# Altium PCB AVR_Programing.PcbDoc
Units mil, origin at the board's own origin, x right, y up, seen from the top; angles counter-clockwise.
Board outline 6000 x 4000 mil, 2 copper layers (Top Layer, Bottom Layer); 20 components, 18 nets, 92 pads, 11 vias.
Unrouted connection lines stored in the file: 56.
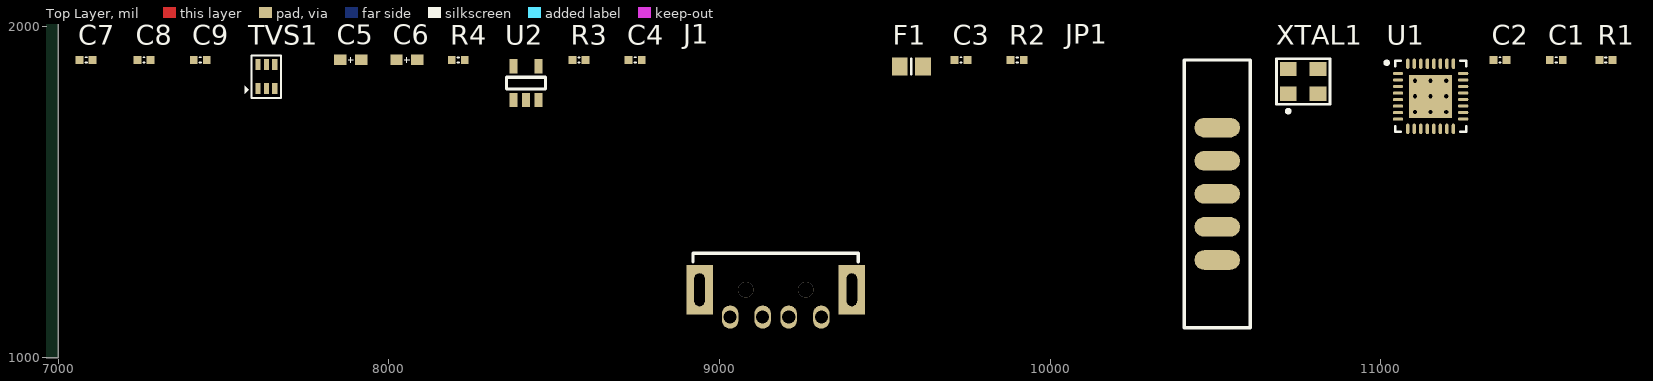
[diagram p0: Top Layer view]
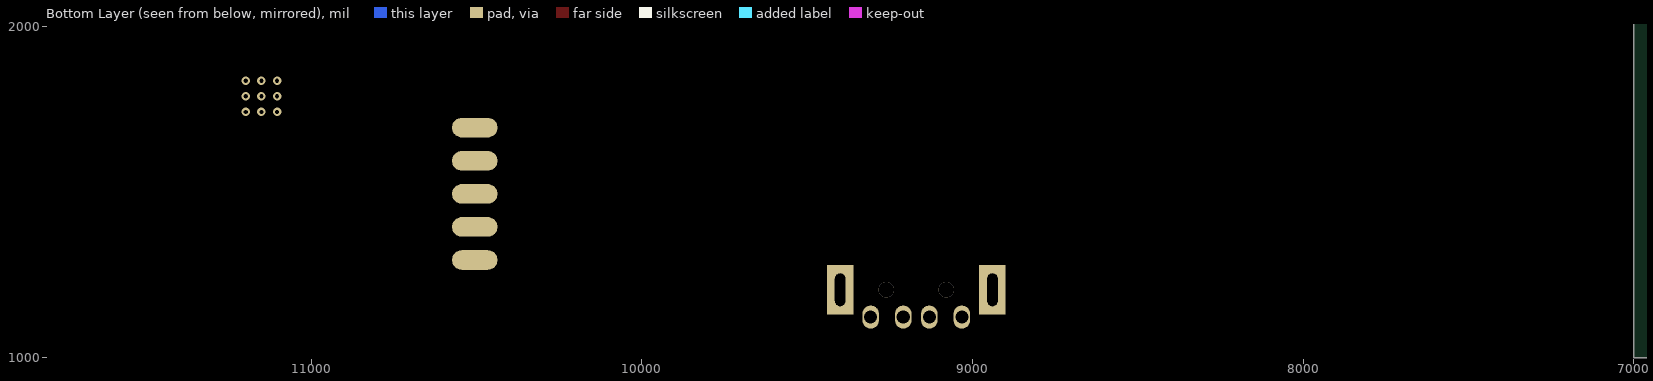
[diagram p1: Bottom Layer view, seen from below]

## Layer stack, top to bottom
Top Solder: solder mask 0.4, Solder Resist, Dk 3.5
Top Layer: signal copper 1.4
Dielectric 1: dielectric 12.6, FR-4, Dk 4.8
Bottom Layer: signal copper 1.4
Bottom Solder: solder mask 0.4, Solder Resist, Dk 3.5

## Board outline
1000,1000 7000,1000 7000,5000 1000,5000

## Design rules (kind name [scope] priority, off if disabled: settings)
Clearance [All] p1: gap=10 ignorepadtopadclearanceinfootprint=FALSE except(0: Arc-Hole Track-Hole SMDPad-Hole THPad-Hole Via-Hole Fill-Hole Poly-Hole Region-Hole Text-Hole)
PolygonConnect [All] p1: connectstyle=Relief reliefconductorwidth=10 reliefentries=4 polygonreliefangle="90 Angle" airgapwidth=10
RoutingVias [All] p1: holewidth=28 width=50 viastyle="Through Hole" minholewidth=28 minwidth=50 maxholewidth=28 maxwidth=50
SolderMaskExpansion [All] p1: expansion=4
Width [All] p1: maxlimit=10 minlimit=10 preferedwidth=10
30 further rules are at their usual default settings.

## Components (designator, comment, footprint, x,y, rotation, side; value= is the part's Value field where it differs from the comment)
C1 "100nF" 0402_cap 11530,1900 r0 top value=103
C2 "18pF" 0402_cap 11360,1900 r0 top value=103
C3 "18pF" 0402_cap 9730,1900 r0 top value=103
C4 "1uF" 0402_cap 8745,1900 r0 top value=103
C5 "1uF" 0603_cap 7885,1900 r0 top value=103
C6 "1uF" 0603_cap 8055,1900 r0 top value=103
C7 "100nF" 0402_cap 7085,1900 r0 top value=103
C8 "100nF" 0402_cap 7260,1900 r0 top value=103
C9 "100nF" 0402_cap 7430,1900 r0 top value=103
F1 "500mA" 0805_Res 9580,1880 r0 top value="R1/4W - 1K"
J1 "USB_A" USB-A 9170,1205 r0 top
JP1 "JP5X2" "IDC10 HORIZONTAL" 10505,1495 r90 top
R1 "10k" 0402_res 11680,1900 r0 top value="R1/4W - 1K"
R2 "1M" 0402_res 9900,1900 r0 top value="R1/4W - 1K"
R3 "22" 0402_res 8575,1900 r0 top value="R1/4W - 1K"
R4 "22" 0402_res 8210,1900 r0 top value="R1/4W - 1K"
TVS1 "SMF05C" SC70-6 7630,1850 r0 top
U1 "ATMEGA16U2" QFN5X5-32_N 11150,1790 r0 top
U2 "TLV702" SOT-23-5 8415,1830 r0 top
XTAL1 "16MHz" XT4-3.2x2.5 10765,1835 r0 top

## Footprints (in the part's own frame and the unit in brackets; to place one, negate y for a bottom-side part, rotate by r counter-clockwise, add the part's x,y. Pads: shape width x height; smd on the part's side, far side on the other; paste and mask are expansions set on the pad)
0402_cap [mm]
  rect 0.6x0.6 smd mask+0: 1(-0.5,0) 2(0.5,0)
  silkscreen extent -0.05,-0.2 0.05,0.2, body extent -0.5,-0.26 0.5,0.27, height 0.36
0402_res [mm]
  rect 0.6x0.6 smd mask+0: 1(-0.5,0) 2(0.5,0)
  silkscreen extent -0.05,-0.2 0.05,0.2, body extent -0.52,-0.3 0.52,0.3, height 0.34
0603_cap [mm]
  rect 0.95x0.8 smd mask+0: 1(-0.8,0) 2(0.8,0)
  silkscreen extent -0.2,-0.2 0.2,0.2, body extent -0.8,-0.4 0.8,0.4, height 0.3
0805_Res [mm] "Chip Resistor, Body 2.0x1.2mm, IPC Medium Density"
  rect 1.2x1.4 smd: 1(-0.9,0) 2(0.9,0)
  silkscreen extent 0,-0.6 0,0.6, body extent -1.15,-0.67 1.15,0.68, height 0.76
"IDC10 HORIZONTAL" [mm]
  oval 1.5x3.5 smd: 1(-5.08,0) 3(-2.54,0) 5(0,0) 7(2.54,0) 9(5.08,0)
  oval 1.5x3.5 smd far side: 2(-5.08,0) 4(-2.54,0) 6(0,0) 8(2.54,0) 10(5.08,0)
  silkscreen extent -10.29,-2.54 10.29,2.54, body extent -10.25,-1.22 10.25,11.38, height 3.23
QFN5X5-32_N [mm] "QFN, 32-Leads, Body 5x5mm, Pitch 0.5mm, IPC Medium Density"
  oval 0.8x0.25 smd: 1(-2.5,1.75) 2(-2.5,1.25) 3(-2.5,0.75) 4(-2.5,0.25) 5(-2.5,-0.25) 6(-2.5,-0.75) 7(-2.5,-1.25) 8(-2.5,-1.75) 17(2.5,-1.75) 18(2.5,-1.25) 19(2.5,-0.75) 20(2.5,-0.25) 21(2.5,0.25) 22(2.5,0.75) 23(2.5,1.25) 24(2.5,1.75)
  oval 0.25x0.8 smd: 9(-1.75,-2.5) 10(-1.25,-2.5) 11(-0.75,-2.5) 12(-0.25,-2.5) 13(0.25,-2.5) 14(0.75,-2.5) 15(1.25,-2.5) 16(1.75,-2.5) 25(1.75,2.5) 26(1.25,2.5) 27(0.75,2.5) 28(0.25,2.5) 29(-0.25,2.5) 30(-0.75,2.5) 31(-1.25,2.5) 32(-1.75,2.5)
  rect 3.3x3.3 smd: 33(0,0)
  silkscreen extent -3.5,-2.73 2.73,2.73, body extent -2.5,-2.5 2.5,2.5, height 0.9
SC70-6 [mm]
  rect 0.4x0.85 smd: 1(-0.65,-0.925) 2(0,-0.925) 3(0.65,-0.925) 4(-0.65,0.925) 5(0,0.925) 6(0.65,0.925)
  silkscreen extent -1.65,-1.65 1.13,1.62, body extent -1.01,-1.06 0.99,1.04, height 0.94
SOT-23-5 [mm] "Other name: SC-74A, SOT-753, 5TSOP"
  rect 0.6x1.1 smd: 1(-0.95,-1.3) 2(0,-1.3) 3(0.95,-1.3) 4(0.95,1.3) 5(-0.95,1.3)
  silkscreen extent -1.5,-0.46 1.5,0.45, body extent -1.5,-1.25 1.5,1.25, height 1.1
USB-A [mm]
  oval 1.27x1.778 hole 1: 1(-3.5,-2.1) 2(-1,-2.1) 3(1,-2.1) 4(3.5,-2.1)
  rect 2.032x3.81 hole 0.787 slot 2.5 at 90 deg: 5(-5.85,0) 6(5.85,0)
  silkscreen extent -6.35,2.16 6.35,2.8, body extent -6.3,-2.24 6.3,17.68, height 3.5
XT4-3.2x2.5 [mm]
  rect 1.3x1.1 smd: 1(-1.15,-0.95) 2(1.15,-0.95) 3(1.15,0.95) 4(-1.15,0.95)
  silkscreen extent -2.06,-2.41 2.06,1.75, body extent -1.6,-1.25 1.6,1.25, height 0.61

## Part data
C1 C2 C3 C4 C5 C6 C7 C8 C9: library part CM, "Cap SMD"
F1 R1 R2 R3 R4: library part R, "Resistor 1/4W"
J1: library part USB_A_MALE
TVS1: "TVS Diode array", Manufacture=ON
U1: "High Performance, Low Power AVR® 8-Bit Microcontroller"
U2: "300-mA, Low-IQ, Low-Dropout Regulator"
XTAL1: library part XT4_SMD, "4 pin crystal surface mount"

## Via types
v1: diameter 25.98, hole 12.99, Top Layer to Bottom Layer, tented both sides, 9 vias
v2: diameter 47.24, hole 47.24, Top Layer to Bottom Layer, tented both sides, 2 vias

## Nets (pads, with @x,y where several pads share a name; then routed paths per layer and width w, separated by ;. In a path a pad name is that pad's centre, name@x,y a point inside that pad or via, vN(x,y) a via of type N, cw(c..) or ccw(c..) an arc to the next point about the centre after c; other vN are vias at no path point)
AT16_RST: C1.2 R1.1 U1.24
GND: C1.1 C2.1 C3.1 C4.1 C5.2 C6.2 C7.1 C8.1 C9.1 J1.4 J1.5 J1.6 JP1.1 JP1.2 TVS1.2 U1.3 U1.28 U1.33 U2.2 XTAL1.2 XTAL1.4
  other v1: 11102.76,1742.76 11150,1742.76 11197.24,1742.76 11102.76,1790 11150,1790 11197.24,1790 11102.76,1837.24 11150,1837.24 11197.24,1837.24
MISO2: JP1.10 U1.17
MOSI2: JP1.8 U1.16
NetC2_2: C2.2 R2.2 U1.2 XTAL1.1
NetC3_2: C3.2 R2.1 U1.1 XTAL1.3
NetC4_2: C4.2 U1.27
NetF1_2: F1.2 J1.1
NetJ1_2: J1.2 R3.2 TVS1.6
NetJ1_3: J1.3 R4.2 TVS1.5
NetR3_1: R3.1 U1.30
NetR4_1: R4.1 U1.29
RST_O: JP1.5 U1.18
SCK2: JP1.6 U1.15
TPICLK: JP1.3 U1.11
TPIDATA: JP1.4 U1.8 U1.9
VDD_3V3: C6.1 JP1.9 U2.5
VDD_5V0: C5.1 C7.2 C8.2 C9.2 F1.1 JP1.7 R1.2 U1.4 U1.31 U1.32 U2.1 U2.3
pads on no net: TVS1.1 TVS1.3 TVS1.4 U1.5 U1.6 U1.7 U1.10 U1.12 U1.13 U1.14 U1.19 U1.20 U1.21 U1.22 U1.23 U1.25 U1.26 U2.4
copper on no net:
  other v2: 9079.45,1205 9260.55,1205